# EAGLE board 13A-777-A-XB (EAGLE 9.6.2)
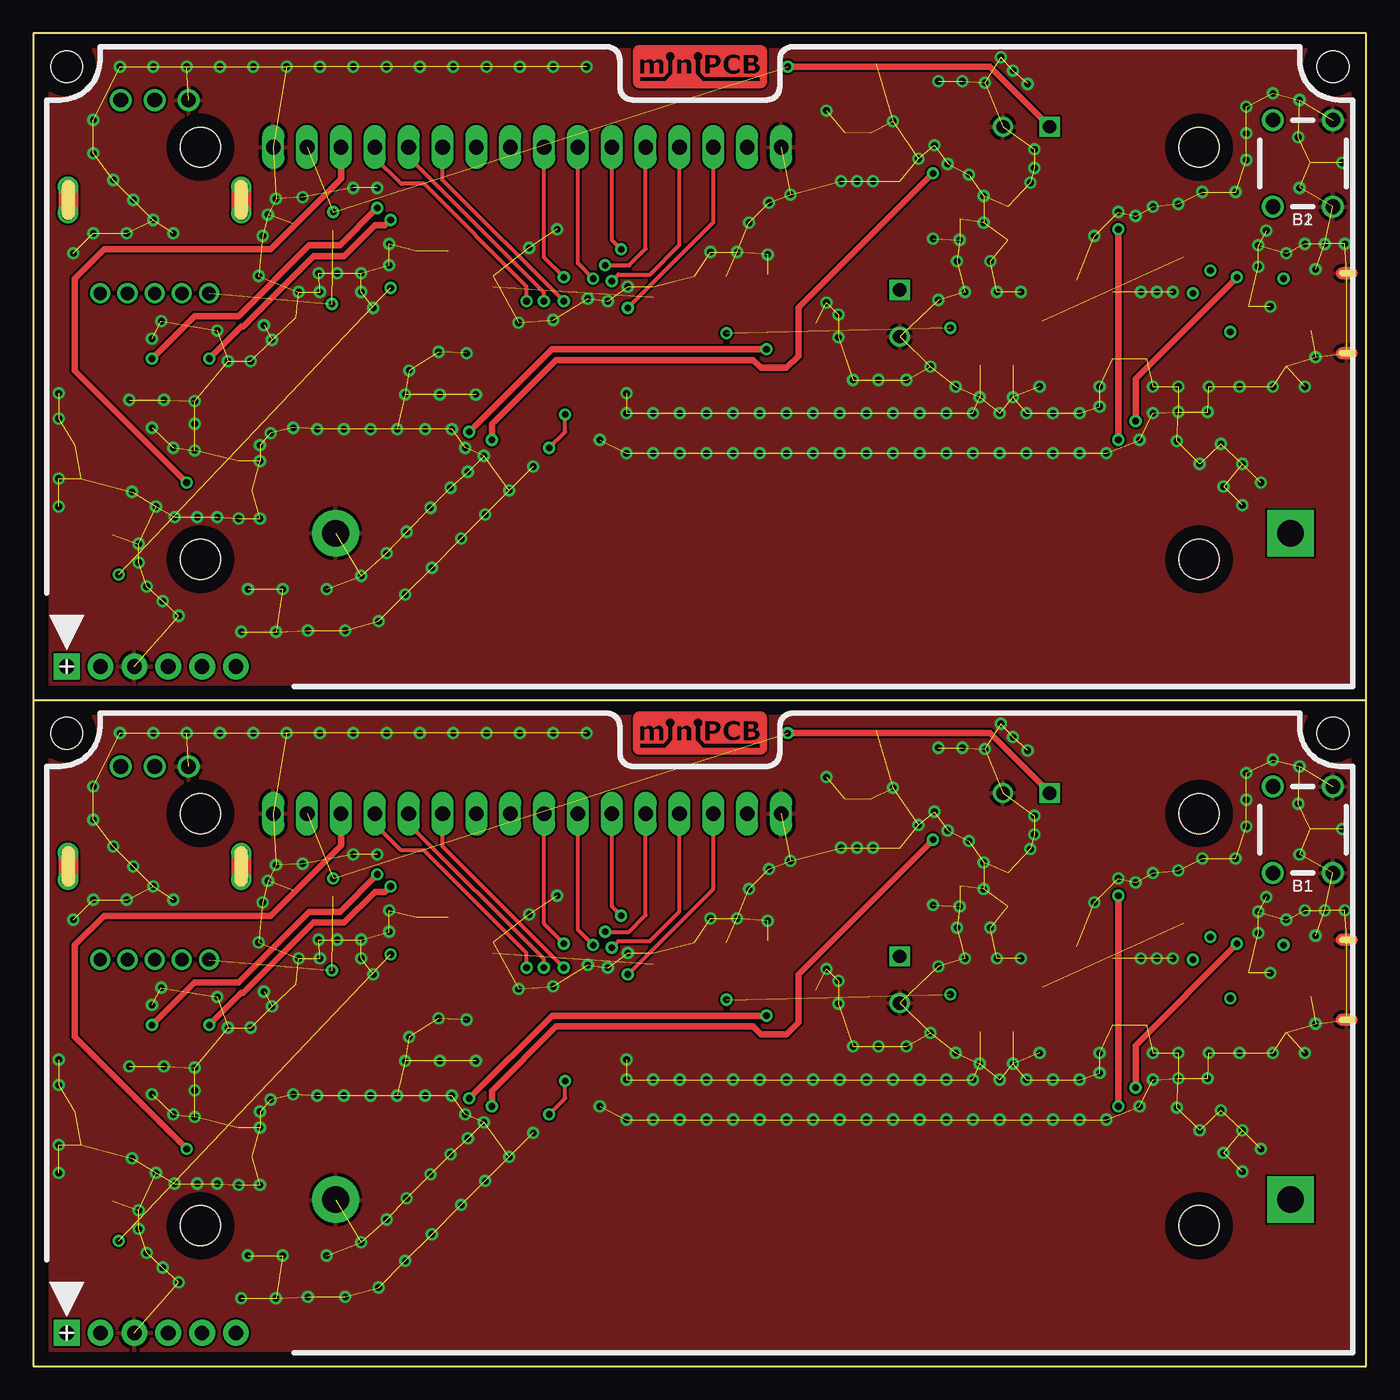
[diagram p0: board, top side]
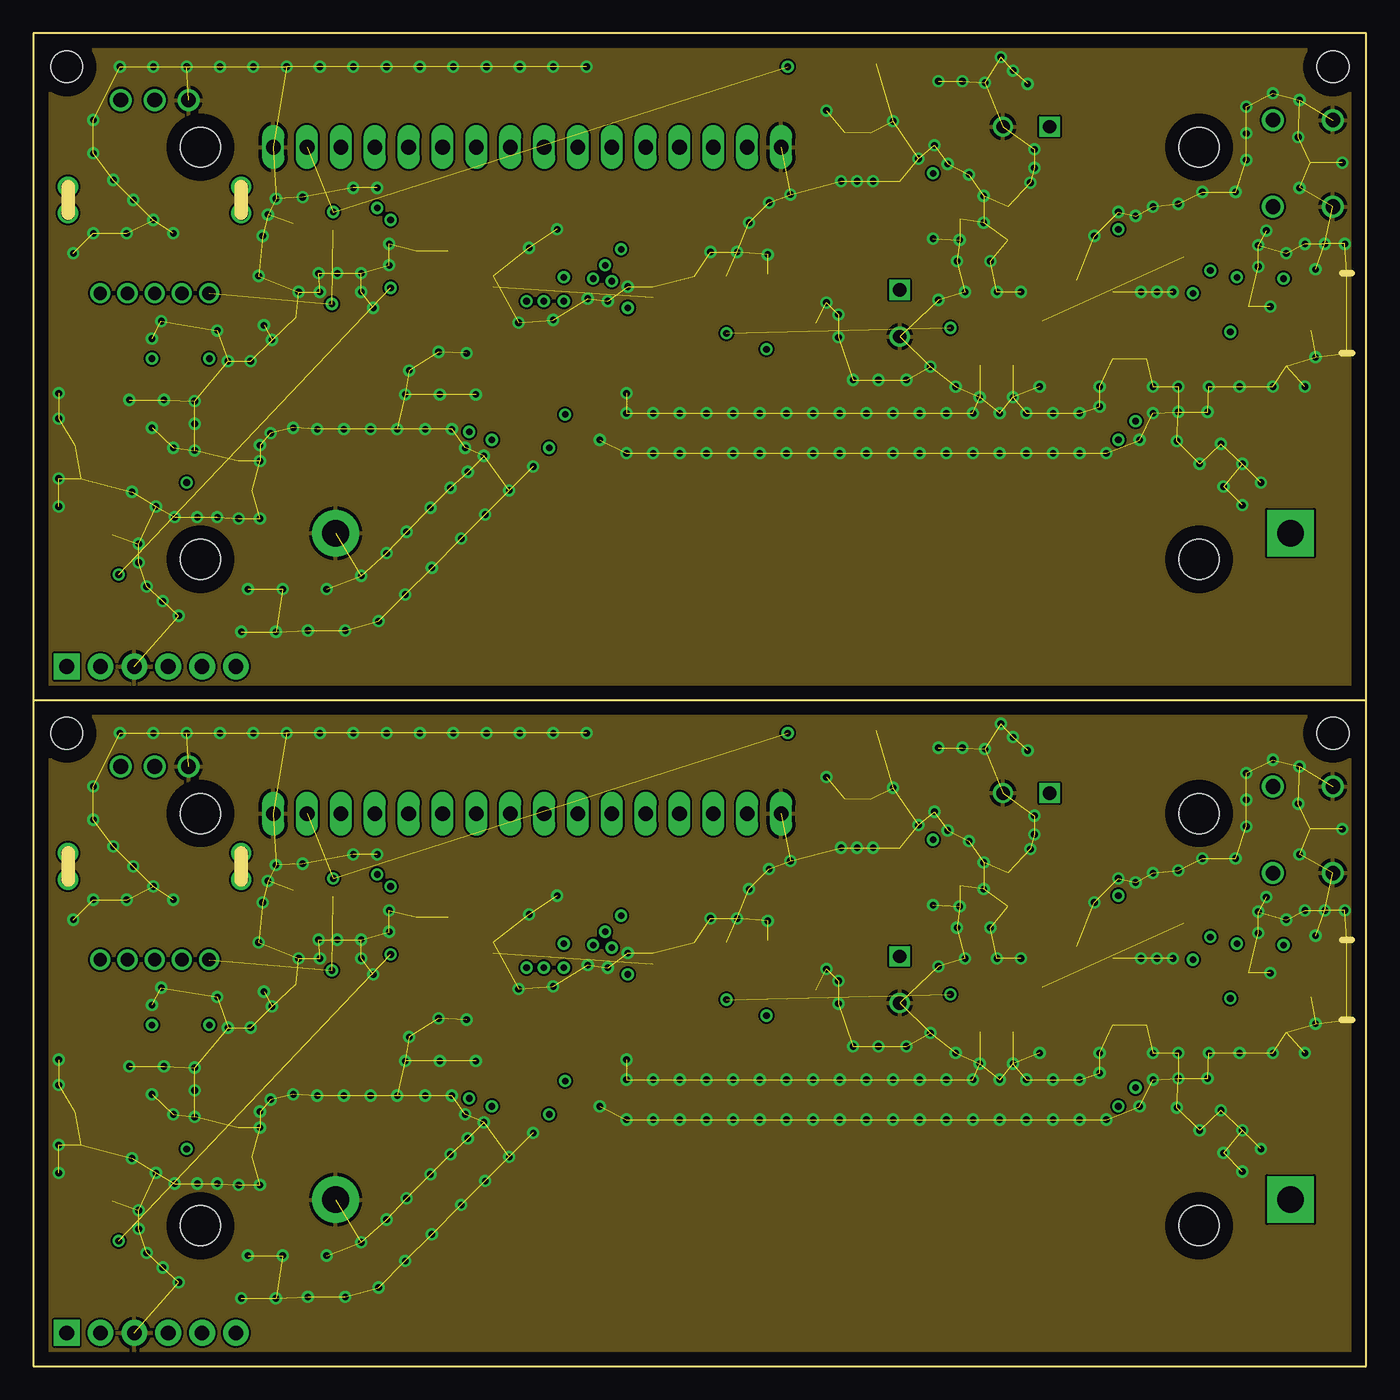
[diagram p1: board, inner layer Route2]
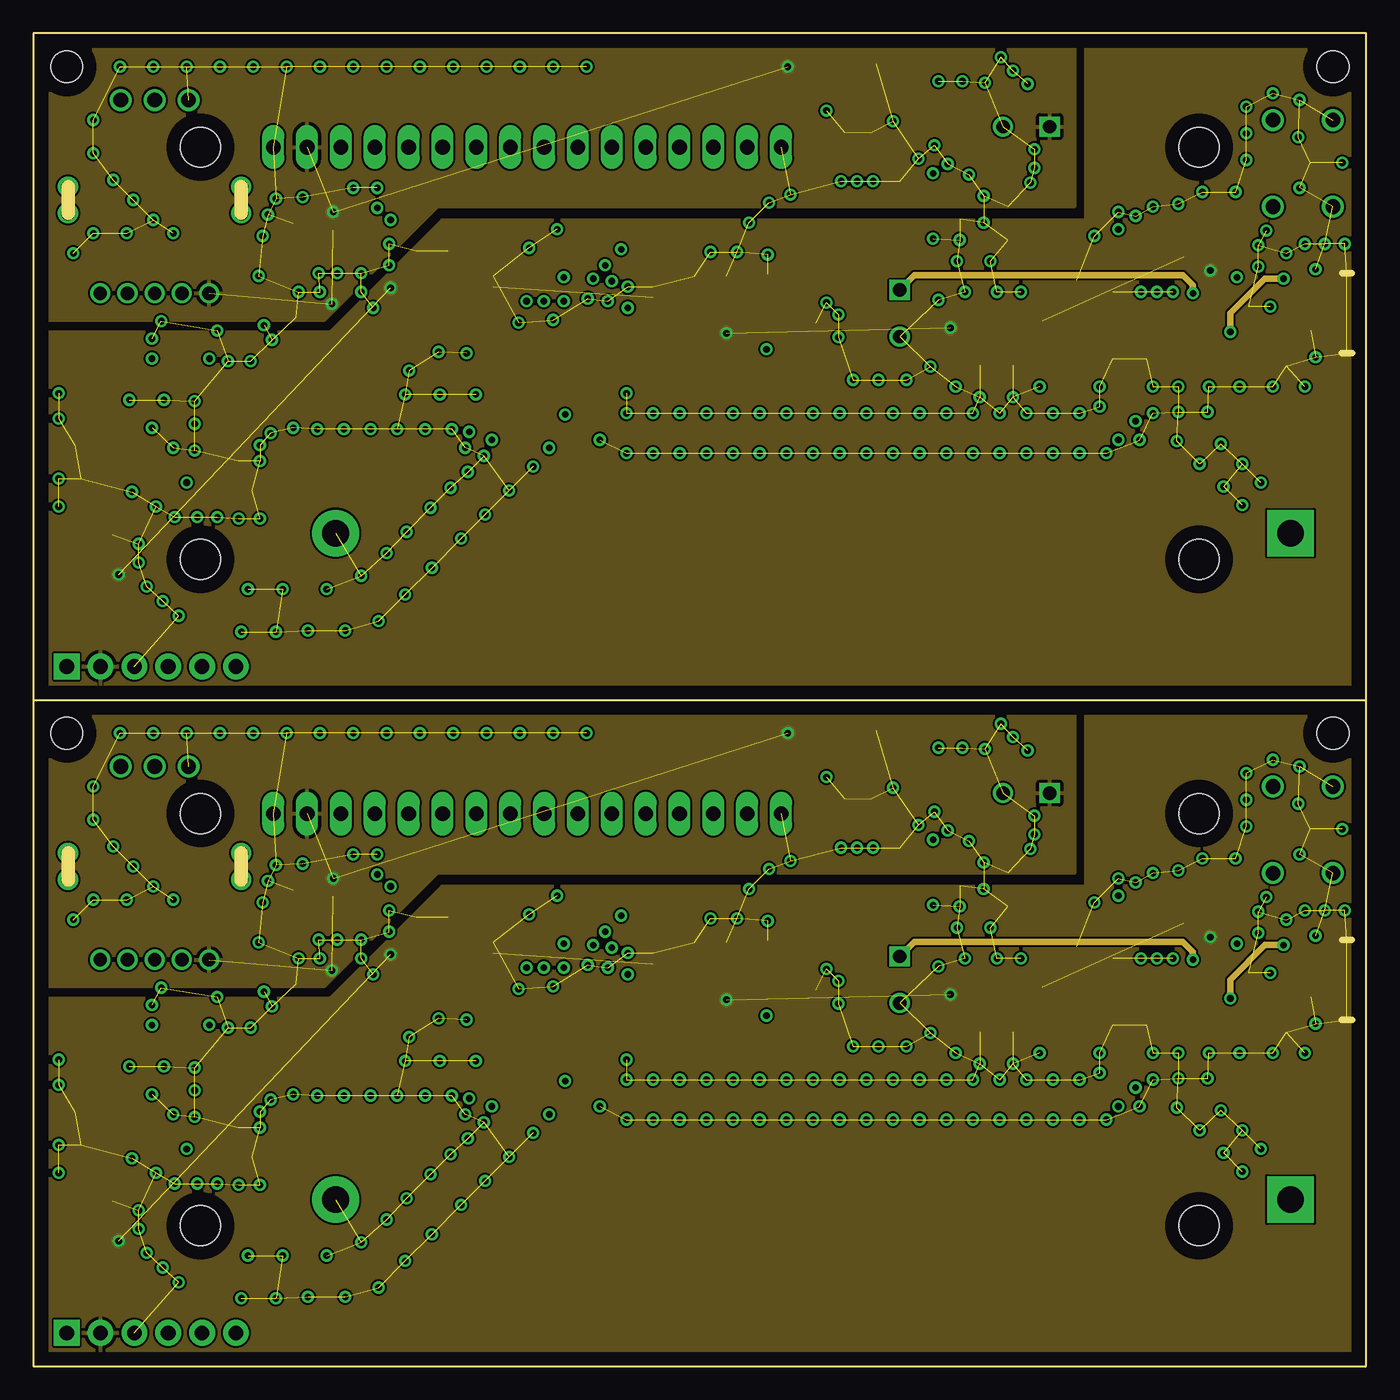
[diagram p2: board, inner layer Route15]
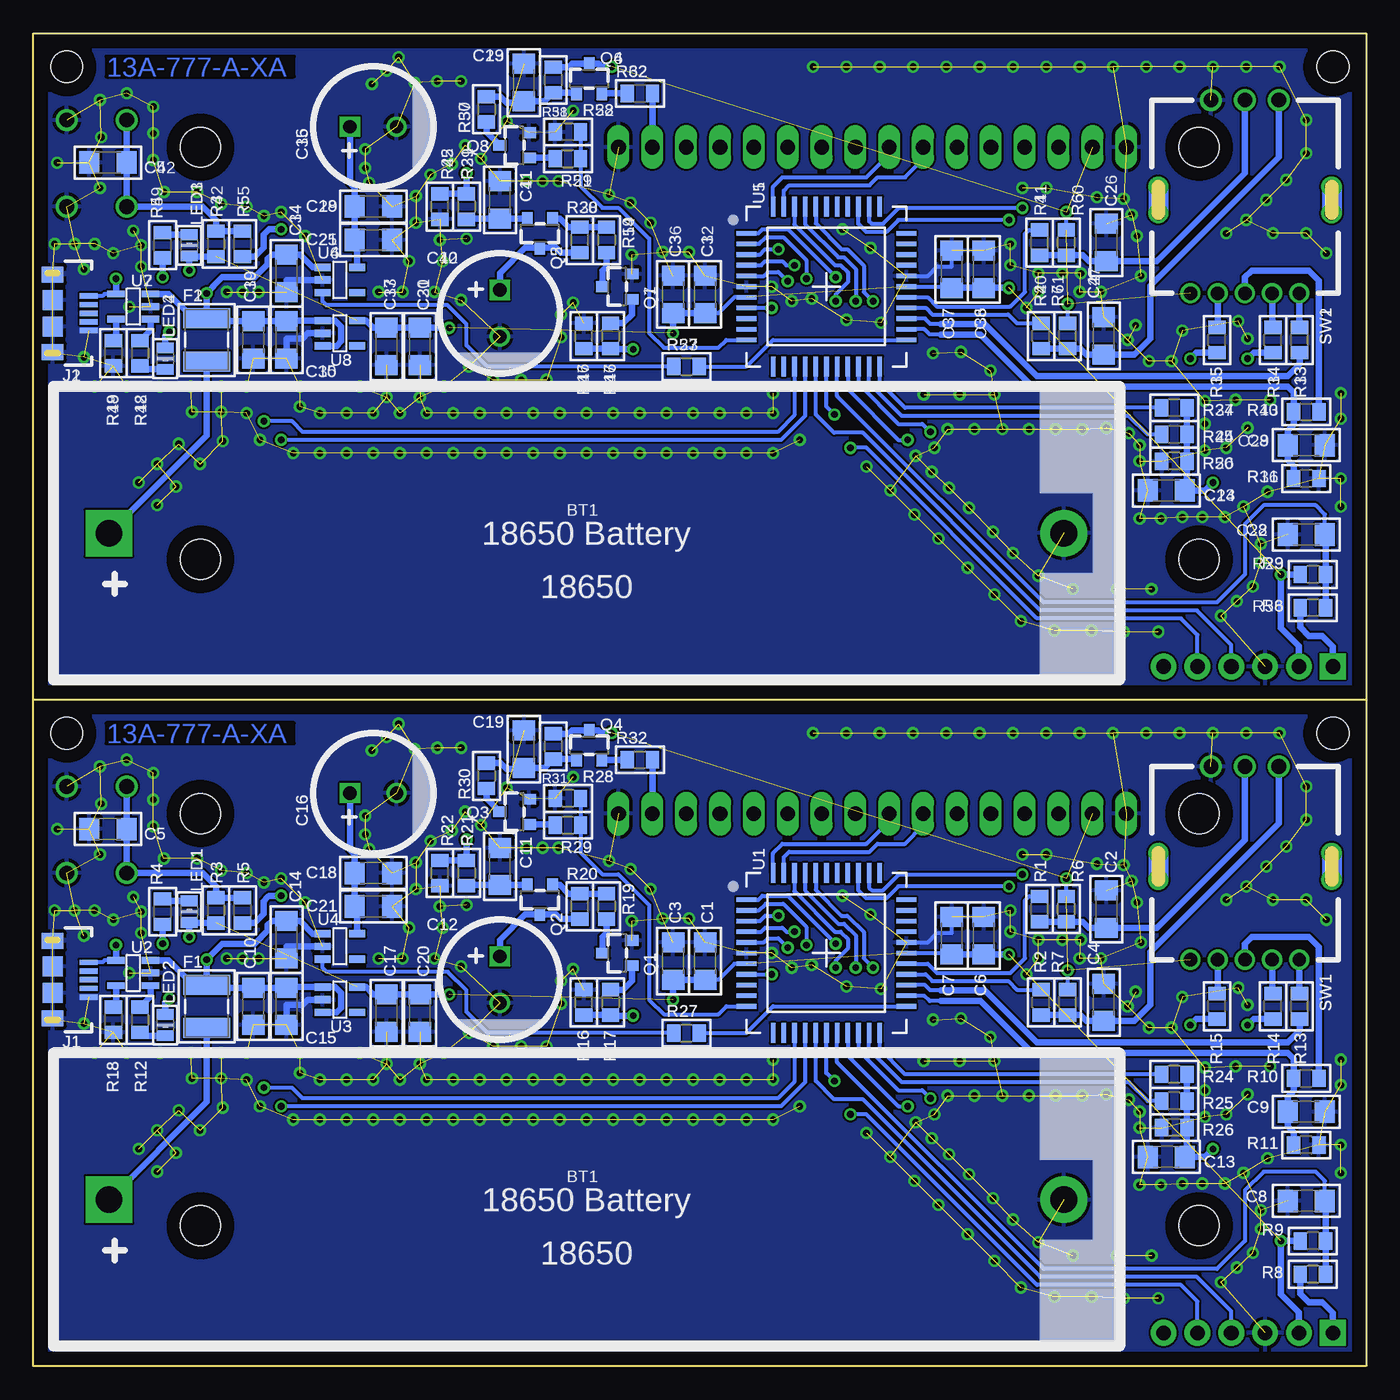
[diagram p3: board, bottom side, seen from below]

Size 100 x 100 mm. Coordinates in mm from the lower left corner, seen from the top.
Outline: 0,0 100,0
Outline: 100,0 100,50
Outline: 0,50 0,0
Outline: 0,50 100,50
Outline: 100,50 100,100
Outline: 100,100 0,100
Outline: 0,100 0,50
Outline: 0,0 0,100
Outline: 100,100 100,0
Copper layers (1*16): Top 0.035mm / dielectric 0.15mm / Bottom 0.035mm
Design rules "default": minimum track width 6mil, minimum drill 0.35mm, track to track 6mil, track to pad 6mil, pad to pad 6mil, via to via 6mil, smd to smd 6mil, copper to edge 40mil, drill to drill 6mil, minimum pad ring 10mil, minimum via ring 8mil, stop-mask expansion 4mil, vias tented up to drill 0mil, thermal gap 10mil

## Footprints (pad centres in the part's own frame; a part is rotated, then mirrored left to right if it is on the bottom)
6X6MM = drill 1.1: 1.A 0,0; 2.A 6.5,0; 3.B 0,4.5; 4.B 6.5,4.5
BATTERY-18650-1-NOHOLES = drill 2 pad 3.5: 1 35.82,0 | drill 2 pad 3.5 square: + -35.82,0
C1206 = smd 1.5 x 1.7: + -1.4,0; - 1.4,0
C3-5MM = drill 1 square: + -1.75,0 | drill 1: - 1.75,0
1812L010DR = smd 1.5 x 3.5: 1 -1.615,0; 2 1.615,0
USB_MICRO_B = smd 0.4 x 1.35: 1 -1.3,1.35; 2 -0.65,1.35; 3 0,1.35; 4 0.65,1.35; 5 1.3,1.35 | smd 0.9 x 1.6: GND5 -3,-1.35; GND8 3,-1.35 | smd 0.9 x 1.6 bottom: GND6 -3,-1.35; GND9 3,-1.35 | smd 1.2 x 1.6: GND7 -2.9,-1.35; GND10 2.9,-1.35 | smd 1.5 x 1.5: XPAD3 -1,-1.35; XPAD4 1,-1.35
CHIP-LED0805 = smd 1.27 x 0.8: A 0,-0.8; C 0,0.8
MINIPCB_0P_50X100MM = hole 2.4: 97.5,47.5; 2.5,47.5
SOT23 = smd 0.8 x 1: 1 -0.95,-1.1; 2 0.95,-1.1; 3 0,1.1
R0805 = smd 1 x 1.3: 1 -0.95,0; 2 0.95,0
SWITCH-ROTARY_ENCODER-12MM = drill 1: 1 7,4.08; 2 7,2.04; 3 7,0; 4 7,-2.04; 5 7,-4.08; GND1 -1,6.5; GND2 1,6.5; GND3 -1,-6.5; GND4 1,-6.5 | drill 1.1: A -7.5,2.54; B -7.5,0; C -7.5,-2.54
SQFP-S-10X10-44 = smd 0.35 x 1.5: 1 -4,-6; 2 -3.2,-6; 3 -2.4,-6; 4 -1.6,-6; 5 -0.8,-6; 6 0,-6; 7 0.8,-6; 8 1.6,-6; 9 2.4,-6; 10 3.2,-6; 11 4,-6; 23 4,6; 24 3.2,6; 25 2.4,6; 26 1.6,6; 27 0.8,6; 28 0,6; 29 -0.8,6; 30 -1.6,6; 31 -2.4,6; 32 -3.2,6; 33 -4,6 | smd 1.5 x 0.35: 12 6,-4; 13 6,-3.2; 14 6,-2.4; 15 6,-1.6; 16 6,-0.8; 17 6,0; 18 6,0.8; 19 6,1.6; 20 6,2.4; 21 6,3.2; 22 6,4; 34 -6,4; 35 -6,3.2; 36 -6,2.4; 37 -6,1.6; 38 -6,0.8; 39 -6,0; 40 -6,-0.8; 41 -6,-1.6; 42 -6,-2.4; 43 -6,-3.2; 44 -6,-4
SOT-23-5_MC_MCH = smd 1.321 x 0.508: 1 -1.295,0.95; 2 -1.295,0; 3 -1.295,-0.95; 4 1.295,-0.95; 5 1.295,0.95
SOT25 = smd 0.55 x 1.2: 1 -0.95,-1.3; 2 0,-1.3; 3 0.95,-1.3; 4 0.95,1.3; 5 -0.95,1.3
PINS_6_PICKIT3 = drill 1.1 pad 1.93 square: 1 0,0 | drill 1.1 pad 1.93: 2 0,-2.54; 3 0,-5.08; 4 0,-7.62; 5 0,-10.16; 6 0,-12.7
LCD1602 = drill 1.1 long: 1 8,33.46; 2 10.54,33.46; 3 13.08,33.46; 4 15.62,33.46; 5 18.16,33.46; 6 20.7,33.46; 7 23.24,33.46; 8 25.78,33.46; 9 28.32,33.46; 10 30.86,33.46; 11 33.4,33.46; 12 35.94,33.46; 13 38.48,33.46; 14 41.02,33.46; 15 43.56,33.46; 16 46.1,33.46 | hole 3: 2.54,2.54; 2.54,33.46; 77.46,33.46; 77.46,2.54

## Placement (x,y rotation side)
B1  [6X6MM]  97.5,37 90 top
B2  [6X6MM]  97.5,87 90 top
BT1  18650  [BATTERY-18650-1-NOHOLES]  58.5,12.5 0 bottom
BT2  18650  [BATTERY-18650-1-NOHOLES]  58.5,62.5 0 bottom
C1  680n  [C1206]  49.6,30.4 90 bottom
C2  680n  [C1206]  19.5,34.3 90 bottom
C3  6n8  [C1206]  52,30.4 90 bottom
C4  680n  [C1206]  19.7,27.3 90 bottom
C5  680n  [C1206]  94.4,40.3 180 bottom
C6  680n  [C1206]  28.7,32.3 90 bottom
C7  6n8  [C1206]  31.1,32.3 90 bottom
C8  680n  [C1206]  4.5,12.4 180 bottom
C9  680n  [C1206]  4.5,19.1 0 bottom
C10  4u7  [C1206]  83.5,27 270 bottom
C11  680n  [C1206]  65,37.5 90 bottom
C12  22u 25V  [C3-5MM]  65,29 270 bottom
C13  680n  [C1206]  15,15.7 180 bottom
C14  680n  [C1206]  81,32 270 bottom
C15  680n  [C1206]  81,27 270 bottom
C16  22u 25V  [C3-5MM]  74.5,43 0 bottom
C17  6n8  [C1206]  73.5,26.5 270 bottom
C18  6n8  [C1206]  74.5,37 0 bottom
C19  680n  [C1206]  63.2,46.3 90 bottom
C20  680n  [C1206]  71,26.5 270 bottom
C21  680n  [C1206]  74.5,34.5 0 bottom
C22  680n  [C1206]  4.5,62.4 180 bottom
C23  680n  [C1206]  63.2,96.3 90 bottom
C24  680n  [C1206]  15,65.7 180 bottom
C25  680n  [C1206]  74.5,84.5 0 bottom
C26  680n  [C1206]  19.5,84.3 90 bottom
C27  680n  [C1206]  19.7,77.3 90 bottom
C28  680n  [C1206]  4.5,69.1 0 bottom
C29  6n8  [C1206]  74.5,87 0 bottom
C30  680n  [C1206]  81,77 270 bottom
C31  680n  [C1206]  71,76.5 270 bottom
C32  680n  [C1206]  49.6,80.4 90 bottom
C33  6n8  [C1206]  73.5,76.5 270 bottom
C34  680n  [C1206]  81,82 270 bottom
C35  22u 25V  [C3-5MM]  74.5,93 0 bottom
C36  6n8  [C1206]  52,80.4 90 bottom
C37  6n8  [C1206]  31.1,82.3 90 bottom
C38  680n  [C1206]  28.7,82.3 90 bottom
C39  4u7  [C1206]  83.5,77 270 bottom
C40  22u 25V  [C3-5MM]  65,79 270 bottom
C41  680n  [C1206]  65,87.5 90 bottom
C42  680n  [C1206]  94.4,90.3 180 bottom
F1  1A  [1812L010DR]  87,27 90 bottom
F2  1A  [1812L010DR]  87,77 90 bottom
J1  [USB_MICRO_B]  97.2,29 270 bottom
J2  [USB_MICRO_B]  97.2,79 270 bottom
LED1  [CHIP-LED0805]  88.3,34.1 0 bottom
LED2  [CHIP-LED0805]  90.1,25.6 180 bottom
LED3  [CHIP-LED0805]  88.3,84.1 0 bottom
LED4  [CHIP-LED0805]  90.1,75.6 180 bottom
PCB  PCB-50/100-0  [MINIPCB_0P_50X100MM]  0,0 0 top
PCB1  PCB-50/100-0  [MINIPCB_0P_50X100MM]  0,50 0 top
Q1  2N7002  [SOT23]  56.2,31 90 bottom
Q2  NTR2101P  [SOT23]  62,35 180 bottom
Q3  2N7002  [SOT23]  63.9,41.6 90 bottom
Q4  NTR2101P  [SOT23]  58.3,46.6 0 bottom
Q5  NTR2101P  [SOT23]  62,85 180 bottom
Q6  NTR2101P  [SOT23]  58.3,96.6 0 bottom
Q7  2N7002  [SOT23]  56.2,81 90 bottom
Q8  2N7002  [SOT23]  63.9,91.6 90 bottom
R1  10k  [R0805]  24.5,34.3 90 bottom
R2  10k  [R0805]  24.4,27.3 90 bottom
R3  10K  [R0805]  86.3,34.2 270 bottom
R4  150  [R0805]  90.3,34.1 90 bottom
R5  10K  [R0805]  84.3,34.2 90 bottom
R6  10k  [R0805]  22.5,34.3 90 bottom
R7  10k  [R0805]  22.4,27.3 90 bottom
R8  150  [R0805]  4,6.9 180 bottom
R9  10k  [R0805]  4,9.4 180 bottom
R10  10K  [R0805]  4.5,21.6 0 bottom
R11  499K  [R0805]  4.5,16.6 180 bottom
R12  150  [R0805]  92,26 270 bottom
R13  150  [R0805]  5,27 90 bottom
R14  150  [R0805]  7,27 90 bottom
R15  150  [R0805]  11.2,27 90 bottom
R16  10k  [R0805]  58.7,27.3 90 bottom
R17  10k  [R0805]  56.7,27.3 270 bottom
R18  2K  [R0805]  94,26 270 bottom
R19  10k  [R0805]  57,34.5 270 bottom
R20  499K  [R0805]  59,34.5 90 bottom
R21  4K99  [R0805]  67.5,37 270 bottom
R22  4K99  [R0805]  69.5,37 90 bottom
R23  10k  [R0805]  4,59.4 180 bottom
R24  1K  [R0805]  14.4,21.9 180 bottom
R25  1K  [R0805]  14.4,19.9 180 bottom
R26  1K  [R0805]  14.4,17.9 180 bottom
R27  150  [R0805]  51,25 0 bottom
R28  10k  [R0805]  59.9,42.6 180 bottom
R29  10k  [R0805]  59.9,40.6 0 bottom
R30  10k  [R0805]  66,44.3 270 bottom
R31  499K  [R0805]  61,46.5 270 bottom
R32  150  [R0805]  54.5,45.5 0 bottom
R33  150  [R0805]  5,77 90 bottom
R34  150  [R0805]  7,77 90 bottom
R35  150  [R0805]  11.2,77 90 bottom
R36  499K  [R0805]  4.5,66.6 180 bottom
R37  1K  [R0805]  14.4,71.9 180 bottom
R38  499K  [R0805]  59,84.5 90 bottom
R39  4K99  [R0805]  67.5,87 270 bottom
R40  10k  [R0805]  24.4,77.3 90 bottom
R41  10k  [R0805]  24.5,84.3 90 bottom
R42  10K  [R0805]  86.3,84.2 270 bottom
R43  10K  [R0805]  4.5,71.6 0 bottom
R44  1K  [R0805]  14.4,69.9 180 bottom
R45  4K99  [R0805]  69.5,87 90 bottom
R46  10k  [R0805]  56.7,77.3 270 bottom
R47  10k  [R0805]  58.7,77.3 90 bottom
R48  150  [R0805]  92,76 270 bottom
R49  2K  [R0805]  94,76 270 bottom
R50  1K  [R0805]  14.4,67.9 180 bottom
R51  10k  [R0805]  59.9,90.6 0 bottom
R52  10k  [R0805]  59.9,92.6 180 bottom
R53  150  [R0805]  51,75 0 bottom
R54  10k  [R0805]  57,84.5 270 bottom
R55  10K  [R0805]  84.3,84.2 90 bottom
R56  150  [R0805]  4,56.9 180 bottom
R57  10k  [R0805]  66,94.3 270 bottom
R58  499K  [R0805]  61,96.5 270 bottom
R59  150  [R0805]  90.3,84.1 90 bottom
R60  10k  [R0805]  22.5,84.3 90 bottom
R61  10k  [R0805]  22.4,77.3 90 bottom
R62  150  [R0805]  54.5,95.5 0 bottom
SW1  PEL12T  [SWITCH-ROTARY_ENCODER-12MM]  9.1,37.5 270 bottom
SW2  PEL12T  [SWITCH-ROTARY_ENCODER-12MM]  9.1,87.5 270 bottom
U1  PIC16F1789T-I/PT  [SQFP-S-10X10-44]  40.5,31 270 bottom
U2  MCP73831  [SOT-23-5_MC_MCH]  92.5,29.5 180 bottom
U3  ADP150AUJZ-3.3-R7  [SOT25]  77,27.5 270 bottom
U4  ADP150AUJZ-3.3-R7  [SOT25]  77,31.5 270 bottom
U5  PIC16F1789T-I/PT  [SQFP-S-10X10-44]  40.5,81 270 bottom
U6  ADP150AUJZ-3.3-R7  [SOT25]  77,81.5 270 bottom
U7  MCP73831  [SOT-23-5_MC_MCH]  92.5,79.5 180 bottom
U8  ADP150AUJZ-3.3-R7  [SOT25]  77,77.5 270 bottom
U$1  PICKIT3ARROW  [PINS_6_PICKIT3]  2.5,2.5 90 top
U$2  PICKIT3ARROW  [PINS_6_PICKIT3]  2.5,52.5 90 top
X1  HD44780LCD-1602  [LCD1602]  10,8 0 top
X2  HD44780LCD-1602  [LCD1602]  10,58 0 top

## Library data of the parts
B1 B2 BT1 BT2 C1-C42 J1 J2 LED1-LED4 Q1-Q8 R1-R62 SW1 SW2 U1 U3-U6 U8 U$1 U$2 X1 X2 = minipcb
F1 F2 = minipcb; ARROW_PART_NUMBER: 1812L050/60MR; ARROW_PRICE-STOCK: https://www.arrow.com/en/products/1812l05060mr/littelfuse?region=nac; DESCRIPTION: Resettable Fuses - PPTC PTC 60V POLYFUSE SURF MOUNT 1812 0.5A; HEIGHT: 1.25mm; MANUFACTURER_NAME: LITTELFUSE; MANUFACTURER_PART_NUMBER: 1812L050/60MR; MOUSER_PART_NUMBER: 576-1812L050/60MR; MOUSER_PRICE-STOCK: https://www.mouser.co.uk/ProductDetail/Littelfuse/1812L050-60MR?qs=lM4gFlnEeEOTL6GzziLnSw%3D%3D
PCB PCB1 = minipcb; PART_NUMBER: 13A-777-A-XA; REVISION: A
U2 U7 = minipcb; COPYRIGHT: Copyright (C) 2023 Ultra Librarian. All rights reserved.; MANUFACTURER_PART_NUMBER: MCP73831T-2ATI/OT; MFR_NAME: Microchip

## Nets
+3V1: C31.+ C32.+ C33.+ C36.+ C37.+ C38.+ LED3.A R23.2 R42.2 U5.7 U5.28 U8.5 U$2.2
+3V3: C1.+ C3.+ C6.+ C7.+ C17.+ C20.+ LED1.A R3.2 R9.2 U1.7 U1.28 U3.5 U$1.2
+3V3-LCD: C16.+ C18.+ C21.+ Q4.3 R6.2 R7.2 R31.1 SW1.5 U4.5 X1.2
+3V3-LCD1: C25.+ C29.+ C35.+ Q6.3 R58.1 R60.2 R61.2 SW2.5 U6.5 X2.2
B1: B1.3.B B1.4.B C5.+ R3.1 R5.2
B2: B2.3.B B2.4.B C42.+ R42.1 R55.2
BT+: BT1.+ F1.1
BT+1: BT2.+ F2.1
BUTTON: R5.1 U1.15
BUTTON1: R55.1 U5.15
ENC_A: R1.2 U1.27
ENC_A1: R41.2 U5.27
ENC_B: R2.2 U1.26
ENC_B1: R40.2 U5.26
ENC_BLUE: R15.1 U1.36
ENC_BLUE1: R35.1 U5.36
ENC_GREEN: R14.1 U1.35
ENC_GREEN1: R34.1 U5.35
ENC_RED: R13.1 U1.25
ENC_RED1: R33.1 U5.25
ENC_SW: C9.+ R10.1 R11.2 U1.24
ENC_SW1: C28.+ R36.2 R43.1 U5.24
GND: B1.1.A B1.2.A BT1.1 C1.- C2.- C3.- C4.- C5.- C6.- C7.- C8.- C9.- C10.- C11.- C12.- C13.- C14.- C15.- C16.- C17.- C18.- C19.- C20.- C21.- J1.5 J1.GND5 J1.GND6 J1.GND7 J1.GND8 J1.GND9 J1.GND10 J1.XPAD3 J1.XPAD4 Q1.2 Q3.2 R11.1 R16.2 R18.2 R22.1 R26.2 R28.2 SW1.C U1.6 U1.29 U2.2 U3.2 U4.2 U$1.3 X1.1 X1.16
GND1: B2.1.A B2.2.A BT2.1 C22.- C23.- C24.- C25.- C26.- C27.- C28.- C29.- C30.- C31.- C32.- C33.- C34.- C35.- C36.- C37.- C38.- C39.- C40.- C41.- C42.- J2.5 J2.GND5 J2.GND6 J2.GND7 J2.GND8 J2.GND9 J2.GND10 J2.XPAD3 J2.XPAD4 Q7.2 Q8.2 R36.1 R45.1 R47.2 R49.2 R50.2 R52.2 SW2.C U5.6 U5.29 U6.2 U7.2 U8.2 U$2.3 X2.1 X2.16
ICSPCLK: U1.17 U$1.5
ICSPCLK1: U5.17 U$2.5
ICSPDAT: U1.16 U$1.4
ICSPDAT1: U5.16 U$2.4
LCD-BACKLIGHT-A: R32.2 X1.15
LCD-BACKLIGHT-A1: R62.2 X2.15
LCD-BACKLIGHT-ENABLE: R28.1 R29.2 U1.11
LCD-BACKLIGHT-ENABLE1: R51.2 R52.1 U5.11
LCD-D0: U1.43 X1.7
LCD-D1: U1.44 X1.8
LCD-D2: U1.1 X1.9
LCD-D3: U1.2 X1.10
LCD-D4: U1.3 X1.11
LCD-D5: U1.4 X1.12
LCD-D6: U1.5 X1.13
LCD-D7: U1.8 X1.14
LCD-D8: U5.44 X2.8
LCD-D9: U5.1 X2.9
LCD-D10: U5.2 X2.10
LCD-D11: U5.43 X2.7
LCD-D12: U5.3 X2.11
LCD-D13: U5.4 X2.12
LCD-D14: U5.5 X2.13
LCD-D15: U5.8 X2.14
LCD-RE: U1.42 X1.6
LCD-RE1: U5.42 X2.6
LCD-RS: U1.40 X1.4
LCD-RS1: U5.40 X2.4
LCD-RW: U1.41 X1.5
LCD-RW1: U5.41 X2.5
LCD-V0: C13.+ R24.1 R25.1 R26.1 X1.3
LCD-V1: C24.+ R37.1 R44.1 R50.1 X2.3
LCD_ENABLE: R27.2 U1.23
LCD_ENABLE1: R53.2 U5.23
LED1: R4.1 U1.14
LED1.K: LED1.C R4.2
LED1.K1: LED3.C R59.2
LED2: R59.1 U5.14
LED2.K: LED2.C R12.2
LED2.K1: LED4.C R48.2
MCLR: C8.+ R8.1 R9.1 U1.18
MCLR1: C22.+ R23.1 R56.1 U5.18
P1-1: R8.2 U$1.1
P1-2: R56.2 U$2.1
PROG: R18.1 U2.5
PROG1: R49.1 U7.5
Q1.D: Q1.3 R19.2
Q1.D1: Q7.3 R54.2
Q1.G: Q1.1 R17.1
Q1.G1: Q7.1 R46.1
Q2.G: Q2.1 R19.1 R20.2
Q2.G1: Q5.1 R38.2 R54.1
Q2.S: C11.+ Q2.2 R21.2
Q2.S1: C41.+ Q5.2 R39.2
Q3.D: Q3.3 R30.2
Q3.D1: Q8.3 R57.2
Q3.G: Q3.1 R29.1
Q3.G1: Q8.1 R51.1
Q4.G: C19.+ Q4.1 R30.1 R31.2
Q4.G1: C23.+ Q6.1 R57.1 R58.2
Q4.S: Q4.2 R32.1
Q4.S1: Q6.2 R62.1
RA0: R21.1 R22.2 U1.19
RA1: R16.1 R17.2 U1.20
RA2: R25.2 U1.21
RA3: R24.2 U1.22
RA4: R44.2 U5.21
RA5: R39.1 R45.2 U5.19
RA6: R37.2 U5.22
RA7: R46.2 R47.1 U5.20
SW1.1: R13.2 SW1.1
SW1.2: R14.2 SW1.2
SW1.3: R10.2 SW1.3
SW1.4: R15.2 SW1.4
SW1.5: R33.2 SW2.1
SW1.6: R34.2 SW2.2
SW1.7: R35.2 SW2.4
SW1.8: R43.2 SW2.3
SW1.A: C2.+ R1.1 R6.1 SW1.B
SW1.A1: C26.+ R41.1 R60.1 SW2.B
SW1.B: C4.+ R2.1 R7.1 SW1.A
SW1.B1: C27.+ R40.1 R61.1 SW2.A
U4.1: R12.1 U2.1
U4.2: R48.1 U7.1
U4.3: R27.1 U4.3
U4.4: R53.1 U6.3
VBAT: C10.+ C12.+ C14.+ C15.+ F1.2 Q2.3 R20.1 U2.3 U3.1 U3.3 U4.1
VBAT1: C30.+ C34.+ C39.+ C40.+ F2.2 Q5.3 R38.1 U6.1 U7.3 U8.1 U8.3
VUSB: J1.1 LED2.A U2.4
VUSB1: J2.1 LED4.A U7.4

## Tracks (layer width: path | path; a pad name or v marks a point on that pad's centre or on a via)
+3V1  (via drill 0.5)  (4 unrouted)
  Bottom 0.3: U5.28 31.2,81 C37.+ 30.1,80.9 | U5.7 47.4,80.2 48.6,79 C32.+
  Bottom 0.5: U8.5 75.05,78.45 74.5,77.9 C33.+ C31.+ v68.8,77.9 | U$2.2 5.04,54.04 6.4,55.4 v6.4,59.4 R23.2 | C37.+ C38.+ v26.8,80.9 | C32.+ C36.+ v52,77.5 | R42.2 88.25,83.25 | 88.25,83.25 LED3.A | v88.3,82.2 88.3,83.2 88.25,83.25
  pour Route15: 99,51 1,51 1,77.6 22.3,77.6 30.7,86 79,86 79,99 99,99
+3V3  (via drill 0.5)  (4 unrouted)
  Bottom 0.3: U1.28 31.2,31 C7.+ 30.1,30.9 | U1.7 47.4,30.2 48.6,29 C1.+
  Bottom 0.5: U3.5 75.05,28.45 74.5,27.9 C17.+ C20.+ v68.8,27.9 | U$1.2 5.04,4.04 6.4,5.4 v6.4,9.4 R9.2 | C7.+ C6.+ v26.8,30.9 | C1.+ C3.+ v52,27.5 | R3.2 88.25,33.25 | 88.25,33.25 LED1.A | v88.3,32.2 88.3,33.2 88.25,33.25
  pour Route15: 99,1 1,1 1,27.6 22.3,27.6 30.7,36 79,36 79,49 99,49
+3V3-LCD  (via drill 0.5)  (4 unrouted)
  Top 0.5: C16.+ 71.75,47.5 v56.6,47.5
  Bottom 0.3: R6.2 v22.5,36.6 | R7.2 v22.4,29.7
  Bottom 0.5: U4.5 75.7,34.3 C21.+ C18.+ 75.9,38.4 76.25,38.75 C16.+ | v56.6,47.5 57.4,47.5 57.6,47.7 Q4.3 59.6,47.7 59.85,47.45 R31.1
  pour Route15: 78.1,49 78.1,37 30.3,37 21.8,28.5 1,28.5 1,49
+3V3-LCD1  (via drill 0.5)  (4 unrouted)
  Top 0.5: C35.+ 71.75,97.5 v56.6,97.5
  Bottom 0.3: R60.2 v22.5,86.6 | R61.2 v22.4,79.7
  Bottom 0.5: U6.5 75.7,84.3 C25.+ C29.+ 75.9,88.4 76.25,88.75 C35.+ | v56.6,97.5 57.4,97.5 57.6,97.7 Q6.3 59.6,97.7 59.85,97.45 R58.1
  pour Route15: 78.1,99 78.1,87 30.3,87 21.8,78.5 1,78.5 1,99
B1
  Bottom 0.5: B1.4.B C5.+ B1.3.B 87.3,37 86.3,36 R3.1 R5.2
B2
  Bottom 0.5: B2.4.B C42.+ B2.3.B 87.3,87 86.3,86 R42.1 R55.2
BT+
  Bottom 0.5: BT1.+ 87,19.82 F1.1
BT+1
  Bottom 0.5: BT2.+ 87,69.82 F2.1
BUTTON  (via drill 0.5)
  Top 0.5: v81.4,19.5 v81.4,35.3
  Bottom 0.3: U1.15 42.1,21.3 43.9,19.5 v81.4,19.5
  Bottom 0.5: R5.1 83.38,33.25 82.72,33.92 82.72,34.88 82.4,35.2 82.3,35.3 v81.4,35.3
BUTTON1  (via drill 0.5)
  Top 0.5: v81.4,69.5 v81.4,85.3
  Bottom 0.3: U5.15 42.1,71.3 43.9,69.5 v81.4,69.5
  Bottom 0.5: R55.1 83.38,83.25 82.72,83.92 82.72,84.88 82.4,85.2 82.3,85.3 v81.4,85.3
ENC_A
  Bottom 0.3: U1.27 32.9,30.2 32.2,29.5 26.7,29.5 25.6,30.6 25.6,34.95 25.3,35.25 R1.2
ENC_A1
  Bottom 0.3: U5.27 32.9,80.2 32.2,79.5 26.7,79.5 25.6,80.6 25.6,84.95 25.3,85.25 R41.2
ENC_B
  Bottom 0.3: U1.26 33.05,29.4 32.55,28.9 26.85,28.9 26.2,28.25 R2.2
ENC_B1
  Bottom 0.3: U5.26 33.05,79.4 32.55,78.9 26.85,78.9 26.2,78.25 R40.2
ENC_BLUE  (via drill 0.5)
  Top 0.5: v13.2,25.6 15.6,28 15.73,28 21.03,33.3 23.33,33.3 25.63,35.6 26.4,35.6 v26.8,36
  Bottom 0.3: v26.8,36 35.1,36 36,35.1 37.5,35.1 38.1,35.7 U1.36
  Bottom 0.5: R15.1 12.75,26.05 v13.2,25.6
ENC_BLUE1  (via drill 0.5)
  Top 0.5: v13.2,75.6 15.6,78 15.73,78 21.03,83.3 23.33,83.3 25.63,85.6 26.4,85.6 v26.8,86
  Bottom 0.3: v26.8,86 35.1,86 36,85.1 37.5,85.1 38.1,85.7 U5.36
  Bottom 0.5: R35.1 12.75,76.05 v13.2,75.6
ENC_GREEN  (via drill 0.5)
  Top 0.5: v8.9,25.6 12.1,28.8 15.4,28.8 20.7,34.1 23,34.1 v25.8,36.9
  Bottom 0.3: U1.35 37.3,35.9 37.1,35.7 36.25,35.7 35.05,36.9 v25.8,36.9
  Bottom 0.5: R14.1 8.45,26.05 v8.9,25.6
ENC_GREEN1  (via drill 0.5)
  Top 0.5: v8.9,75.6 12.1,78.8 15.4,78.8 20.7,84.1 23,84.1 v25.8,86.9
  Bottom 0.3: U5.35 37.3,85.9 37.1,85.7 36.25,85.7 35.05,86.9 v25.8,86.9
  Bottom 0.5: R34.1 8.45,76.05 v8.9,75.6
ENC_RED
  Bottom 0.3: U1.25 33.1,28.6 32.7,28.2 31.9,28.2
  Bottom 0.5: R13.1 5,25.2 5.9,24.3 24.7,24.3 28.6,28.2 31.9,28.2
ENC_RED1
  Bottom 0.3: U5.25 33.1,78.6 32.7,78.2 31.9,78.2
  Bottom 0.5: R33.1 5,75.2 5.9,74.3 24.7,74.3 28.6,78.2 31.9,78.2
ENC_SW
  Bottom 0.3: U1.24 33.15,27.8 32.75,27.4 31.9,27.4
  Bottom 0.5: R11.2 5.45,17.55 5.9,18 C9.+ 5.9,20.2 5.45,20.65 R10.1 5.45,23.05 5.9,23.5 25.03,23.5 28.93,27.4 31.9,27.4
ENC_SW1
  Bottom 0.3: U5.24 33.15,77.8 32.75,77.4 31.9,77.4
  Bottom 0.5: R36.2 5.45,67.55 5.9,68 C28.+ 5.9,70.2 5.45,70.65 R43.1 5.45,73.05 5.9,73.5 25.03,73.5 28.93,77.4 31.9,77.4
GND  (via drill 0.5)  (292 unrouted)
  Bottom 0.3: U1.29 32.9,31.8 32.2,32.5 31.1,32.5 C7.-
  Bottom 0.5: U3.2 79.4,27.5 79.8,27.1 81,27.1 C15.- | U4.2 81,31.5 C14.-
  other vias: 92.8,29.5 85.5,30.6 84.3,30.6 83.1,30.6 44.6,31 50.8,33.6 71.3,35.8 71.3,37.8 69.5,34.5 55.1,33.4 52.8,33.6 63,38.9 66.4,40.6 61.8,38.9 60.6,38.9 56.8,37.9 55.2,37.3 53.7,35.8 67.6,41.6 64.5,43.4 59.5,44.2 60.4,27.2 60.4,28.9 59.5,29.8 17,17.9 17,19.1 17,13.6 15.4,13.6 13.8,13.7 12.3,13.7 10.6,13.7 7.9,11.7 7.9,10.3 8.5,8.5 10.9,6.3 9.7,7.4 9.2,14.5 7.4,15.6 12.1,22.4 9.8,22.5 7.2,22.5 12.1,18.7 12.1,20.7 17.8,20 19.5,20.4 31.4,20.3 33.8,18.3 29.4,20.3 27.3,20.3 32.6,17.1 32.4,18.9 31.3,15.9 29.8,14.4 95.4,23.5 93,23.5 90.5,23.5 88.2,23.5 85.9,23.5 84,23.5 80,23.5 75.5,23.5 69.2,23.5 73.5,22.7 71,22.7 74.1,30.6 72.3,30.6 69.9,30.6 67.9,30 69.3,32.9 71.8,32.9 67.5,34.6 95,38.4 94.9,42.2 98.2,40.3 90.2,38.1 87.7,38.1 85.9,37.2 91.9,34.1 92.5,35.2 91.9,32.5 82.7,36.3 81.4,36.6 79.6,34.8 75.1,41.3 75.1,39.9 74.8,38.8 70.2,39.4 68.6,40.2 71.4,46.3 69.7,46.4 67.9,46.4 74.6,46.2 73.5,47.2 72.6,48.2 17.9,27 17.3,28.1 21.4,32 19.9,30.6 16.9,31.8 22.8,32 24.6,32 25.5,29.4 24.6,30.6 21.5,30.6 20.2,37.7 18.2,37.6 17.6,36.4 17.2,34.8 25.8,38.4 24,38.4 26.7,34.2 26.7,32.6 37.2,33.9 39.3,35.3 36.4,28.3 39,28.5 43.1,29.9 41.6,30.1 32.5,26 30.4,26.1 28.2,24.7 33.2,22.9 30.5,22.9 27.9,22.9 16.3,25.4 14.6,25.4 13.8,27.7 8.9,27.1 9.6,28.4 10.5,18.9 8.9,20.4 1.9,21.1 1.9,23 1.9,16.6 1.9,14.5 65.5,24 63.4,24 61.5,24 67.3,25 37.5,17.5 35.7,15.7 33.9,13.9 32.1,12.1 29.9,9.9 27.9,7.9 25.9,5.9 23.4,5.2 20.6,5.2 18.2,5.1 15.6,5.1 28,12.6 26.5,11 24.6,9.3 22,8.3 18.7,8.3 16.1,8.3 98.4,34.2 96.9,34.2 95.4,34.2 96.2,25.7 96.2,32.3 88.1,21.6 89.1,19.2 92.1,16.3 90.7,17.7 85.9,21.6 87.5,17.7 89.3,16 90.7,14.6 85.8,19.4 74.5,18.5 78.5,21.5 72.5,18.5 70.5,18.5 68.5,18.5 66.5,18.5 64.5,18.5 62.5,18.5 60.5,18.5 58.5,18.5 56.5,18.5 54.5,18.5 52.5,18.5 50.5,18.5 48.5,18.5 76.5,21.5 74.5,21.5 72.5,21.5 70.5,21.5 68.5,21.5 66.5,21.5 64.5,21.5 62.5,21.5 60.5,21.5 58.5,21.5 56.5,21.5 54.5,21.5 52.5,21.5 50.5,21.5 80,22 76.5,18.5 78.5,18.5 80.5,18.5 48.5,21.5 46.5,21.5 46.5,18.5 44.5,21.5 44.5,18.5 42.5,19.5 83,19.5 84,21.5 84,37 91,44.5 91,42.5 95,45 93,45.5 91,40.5 94,33.5 44.5,23 25.3,20.3 23.3,20.3 21.3,20.3 16.5,47.5 14,47.5 11.5,47.5 9,47.5 4.5,43.5 4.5,41 6,39 7.5,37.5 19,47.5 21.5,47.5 24,47.5 26.5,47.5 29,47.5 31.5,47.5 34,47.5 36.5,47.5 39,47.5 41.5,47.5 6.5,47.5 9,36 7,35 4.5,35 3,33.5 10.5,35
  pour Bottom: 99,1 1,1 1,49 99,49
  pour Top: 99,1 1,1 1,49 99,49
  pour Route2: 99,1 1,1 1,49 99,49
GND1  (via drill 0.5)  (292 unrouted)
  Bottom 0.3: U5.29 32.9,81.8 32.2,82.5 31.1,82.5 C37.-
  Bottom 0.5: U8.2 79.4,77.5 79.8,77.1 81,77.1 C30.- | U6.2 81,81.5 C34.-
  other vias: 92.8,79.5 85.5,80.6 84.3,80.6 83.1,80.6 44.6,81 50.8,83.6 71.3,85.8 71.3,87.8 69.5,84.5 55.1,83.4 52.8,83.6 63,88.9 66.4,90.6 61.8,88.9 60.6,88.9 56.8,87.9 55.2,87.3 53.7,85.8 67.6,91.6 64.5,93.4 59.5,94.2 60.4,77.2 60.4,78.9 59.5,79.8 17,67.9 17,69.1 17,63.6 15.4,63.6 13.8,63.7 12.3,63.7 10.6,63.7 7.9,61.7 7.9,60.3 8.5,58.5 10.9,56.3 9.7,57.4 9.2,64.5 7.4,65.6 12.1,72.4 9.8,72.5 7.2,72.5 12.1,68.7 12.1,70.7 17.8,70 19.5,70.4 31.4,70.3 33.8,68.3 29.4,70.3 27.3,70.3 32.6,67.1 32.4,68.9 31.3,65.9 29.8,64.4 95.4,73.5 93,73.5 90.5,73.5 88.2,73.5 85.9,73.5 84,73.5 80,73.5 75.5,73.5 69.2,73.5 73.5,72.7 71,72.7 74.1,80.6 72.3,80.6 69.9,80.6 67.9,80 69.3,82.9 71.8,82.9 67.5,84.6 95,88.4 94.9,92.2 98.2,90.3 90.2,88.1 87.7,88.1 85.9,87.2 91.9,84.1 92.5,85.2 91.9,82.5 82.7,86.3 81.4,86.6 79.6,84.8 75.1,91.3 75.1,89.9 74.8,88.8 70.2,89.4 68.6,90.2 71.4,96.3 69.7,96.4 67.9,96.4 74.6,96.2 73.5,97.2 72.6,98.2 17.9,77 17.3,78.1 21.4,82 19.9,80.6 16.9,81.8 22.8,82 24.6,82 25.5,79.4 24.6,80.6 21.5,80.6 20.2,87.7 18.2,87.6 17.6,86.4 17.2,84.8 25.8,88.4 24,88.4 26.7,84.2 26.7,82.6 37.2,83.9 39.3,85.3 36.4,78.3 39,78.5 43.1,79.9 41.6,80.1 32.5,76 30.4,76.1 28.2,74.7 33.2,72.9 30.5,72.9 27.9,72.9 16.3,75.4 14.6,75.4 13.8,77.7 8.9,77.1 9.6,78.4 10.5,68.9 8.9,70.4 1.9,71.1 1.9,73 1.9,66.6 1.9,64.5 65.5,74 63.4,74 61.5,74 67.3,75 37.5,67.5 35.7,65.7 33.9,63.9 32.1,62.1 29.9,59.9 27.9,57.9 25.9,55.9 23.4,55.2 20.6,55.2 18.2,55.1 15.6,55.1 28,62.6 26.5,61 24.6,59.3 22,58.3 18.7,58.3 16.1,58.3 98.4,84.2 96.9,84.2 95.4,84.2 96.2,75.7 96.2,82.3 88.1,71.6 89.1,69.2 92.1,66.3 90.7,67.7 85.9,71.6 87.5,67.7 89.3,66 90.7,64.6 85.8,69.4 74.5,68.5 78.5,71.5 72.5,68.5 70.5,68.5 68.5,68.5 66.5,68.5 64.5,68.5 62.5,68.5 60.5,68.5 58.5,68.5 56.5,68.5 54.5,68.5 52.5,68.5 50.5,68.5 48.5,68.5 76.5,71.5 74.5,71.5 72.5,71.5 70.5,71.5 68.5,71.5 66.5,71.5 64.5,71.5 62.5,71.5 60.5,71.5 58.5,71.5 56.5,71.5 54.5,71.5 52.5,71.5 50.5,71.5 80,72 76.5,68.5 78.5,68.5 80.5,68.5 48.5,71.5 46.5,71.5 46.5,68.5 44.5,71.5 44.5,68.5 42.5,69.5 83,69.5 84,71.5 84,87 91,94.5 91,92.5 95,95 93,95.5 91,90.5 94,83.5 44.5,73 25.3,70.3 23.3,70.3 21.3,70.3 16.5,97.5 14,97.5 11.5,97.5 9,97.5 4.5,93.5 4.5,91 6,89 7.5,87.5 19,97.5 21.5,97.5 24,97.5 26.5,97.5 29,97.5 31.5,97.5 34,97.5 36.5,97.5 39,97.5 41.5,97.5 6.5,97.5 9,86 7,85 4.5,85 3,83.5 10.5,85
  pour Bottom: 99,51 1,51 1,99 99,99
  pour Top: 99,51 1,51 1,99 99,99
  pour Route2: 99,51 1,51 1,99 99,99
ICSPCLK  (via drill 0.5)
  Top 0.3: v38.7,18.9 39.9,20.1 v39.9,21.4
  Bottom 0.3: U$1.5 12.66,4.86 13.9,6.1 24.7,6.1 37.5,18.9 v38.7,18.9 | v39.9,21.4 40.5,22 U1.17
ICSPCLK1  (via drill 0.5)
  Top 0.3: v38.7,68.9 39.9,70.1 v39.9,71.4
  Bottom 0.3: U$2.5 12.66,54.86 13.9,56.1 24.7,56.1 37.5,68.9 v38.7,68.9 | v39.9,71.4 40.5,72 U5.17
ICSPDAT
  Bottom 0.3: U$1.4 10.12,4.12 12.7,6.7 24.45,6.7 37.77,20.03 39.93,20.03 41.3,21.4 U1.16
ICSPDAT1
  Bottom 0.3: U$2.4 10.12,54.12 12.7,56.7 24.45,56.7 37.77,70.03 39.93,70.03 41.3,71.4 U5.16
LCD-BACKLIGHT-A
  Bottom 0.5: R32.2 X1.15
LCD-BACKLIGHT-A1
  Bottom 0.5: R62.2 X2.15
LCD-BACKLIGHT-ENABLE
  Bottom 0.3: U1.11 48,27 48.6,26.4 52.7,26.4 53.8,27.5 53.8,34.6 56.1,36.9 57.3,36.9 58.95,38.55 R29.2 R28.1
LCD-BACKLIGHT-ENABLE1
  Bottom 0.3: U5.11 48,77 48.6,76.4 52.7,76.4 53.8,77.5 53.8,84.6 56.1,86.9 57.3,86.9 58.95,88.55 R51.2 R52.1
LCD-D0
  Bottom 0.3: U1.43 43.7,38.2 43.3,38.6 37.25,38.6 36.65,39.2 34.6,39.2 33.24,40.56 X1.7
LCD-D1
  Bottom 0.3: U1.44 44.5,38.5 43.8,39.2 37.5,39.2 35.78,40.92 X1.8
LCD-D2  (via drill 0.5)
  Top 0.3: v39.8,31.7 38.32,33.18 X1.9
  Bottom 0.3: U1.1 45.6,35 45.3,35.3 43.4,35.3 v39.8,31.7
LCD-D3  (via drill 0.5)
  Top 0.3: v42,31.6 40.86,32.74 X1.10
  Bottom 0.3: U1.2 45.55,34.2 45.05,34.7 43.73,34.7 42,32.97 v42,31.6
LCD-D4  (via drill 0.5)
  Top 0.3: v44.1,33.8 43.4,34.5 X1.11
  Bottom 0.3: U1.3 45.5,33.4 45.1,33.8 v44.1,33.8
LCD-D5  (via drill 0.5)
  Top 0.3: v42.9,32.6 44.7,32.6 45.94,33.84 X1.12
  Bottom 0.3: U1.4 45.4,32.6 45.1,32.9 43.8,32.9 43.5,32.6 v42.9,32.6
LCD-D6  (via drill 0.5)
  Top 0.3: v43.4,31.4 43.9,31.9 46.25,31.9 48.48,34.13 X1.13
  Bottom 0.3: U1.5 45.2,31.8 44.9,32.1 44.1,32.1 v43.4,31.4
LCD-D7  (via drill 0.5)
  Top 0.3: v44.6,29.4 51.02,35.82 X1.14
  Bottom 0.3: U1.8 v44.6,29.4
LCD-D8
  Bottom 0.3: U5.44 44.5,88.5 43.8,89.2 37.5,89.2 35.78,90.92 X2.8
LCD-D9  (via drill 0.5)
  Top 0.3: v39.8,81.7 38.32,83.18 X2.9
  Bottom 0.3: U5.1 45.6,85 45.3,85.3 43.4,85.3 v39.8,81.7
LCD-D10  (via drill 0.5)
  Top 0.3: v42,81.6 40.86,82.74 X2.10
  Bottom 0.3: U5.2 45.55,84.2 45.05,84.7 43.73,84.7 42,82.97 v42,81.6
LCD-D11
  Bottom 0.3: U5.43 43.7,88.2 43.3,88.6 37.25,88.6 36.65,89.2 34.6,89.2 33.24,90.56 X2.7
LCD-D12  (via drill 0.5)
  Top 0.3: v44.1,83.8 43.4,84.5 X2.11
  Bottom 0.3: U5.3 45.5,83.4 45.1,83.8 v44.1,83.8
LCD-D13  (via drill 0.5)
  Top 0.3: v42.9,82.6 44.7,82.6 45.94,83.84 X2.12
  Bottom 0.3: U5.4 45.4,82.6 45.1,82.9 43.8,82.9 43.5,82.6 v42.9,82.6
LCD-D14  (via drill 0.5)
  Top 0.3: v43.4,81.4 43.9,81.9 46.25,81.9 48.48,84.13 X2.13
  Bottom 0.3: U5.5 45.2,81.8 44.9,82.1 44.1,82.1 v43.4,81.4
LCD-D15  (via drill 0.5)
  Top 0.3: v44.6,79.4 51.02,85.82 X2.14
  Bottom 0.3: U5.8 v44.6,79.4
LCD-RE  (via drill 0.5)
  Top 0.3: v39.8,29.9 30.7,39 X1.6
  Bottom 0.3: U1.42 42.9,35.65 39.85,32.6 39.43,32.6 38.9,32.07 38.9,31.33 39.8,30.43 v39.8,29.9
LCD-RE1  (via drill 0.5)
  Top 0.3: v39.8,79.9 30.7,89 X2.6
  Bottom 0.3: U5.42 42.9,85.65 39.85,82.6 39.43,82.6 38.9,82.07 38.9,81.33 39.8,80.43 v39.8,79.9
LCD-RS  (via drill 0.5)
  Top 0.3: v37,29.9 37,31 29.3,38.7 27.6,38.7 25.62,40.68 X1.4
  Bottom 0.3: U1.40 41.3,35.75 39.35,33.8 38.93,33.8 37.7,32.57 37.7,30.6 v37,29.9
LCD-RS1  (via drill 0.5)
  Top 0.3: v37,79.9 37,81 29.3,88.7 27.6,88.7 25.62,90.68 X2.4
  Bottom 0.3: U5.40 41.3,85.75 39.35,83.8 38.93,83.8 37.7,82.57 37.7,80.6 v37,79.9
LCD-RW  (via drill 0.5)
  Top 0.3: v38.3,29.9 38.3,30.55 28.16,40.69 X1.5
  Bottom 0.3: U1.41 42.1,35.7 39.6,33.2 39.18,33.2 38.3,32.32 v38.3,29.9
LCD-RW1  (via drill 0.5)
  Top 0.3: v38.3,79.9 38.3,80.55 28.16,90.69 X2.5
  Bottom 0.3: U5.41 42.1,85.7 39.6,83.2 39.18,83.2 38.3,82.32 v38.3,79.9
LCD-V0  (via drill 0.5)
  Top 0.5: v11.5,16.3 3.1,24.7 3.1,31.6 5.3,33.8 17.8,33.8 23.08,39.08 X1.3
  Bottom 0.5: R24.1 R25.1 R26.1 13.45,15.85 C13.+ 12.1,15.7 v11.5,16.3
LCD-V1  (via drill 0.5)
  Top 0.5: v11.5,66.3 3.1,74.7 3.1,81.6 5.3,83.8 17.8,83.8 23.08,89.08 X2.3
  Bottom 0.5: R37.1 R44.1 R50.1 13.45,65.85 C24.+ 12.1,65.7 v11.5,66.3
LCD_ENABLE
  Bottom 0.3: R27.2 46.5,25 44.5,27 U1.23
LCD_ENABLE1
  Bottom 0.3: R53.2 46.5,75 44.5,77 U5.23
LED1  (via drill 0.5)
  Top 0.5: v82.7,20.9 82.7,24.09 90.3,31.69 v90.3,31.7
  Bottom 0.3: U1.14 42.9,21.35 44.15,20.1 79.8,20.1 80.6,20.9 v82.7,20.9
  Bottom 0.5: R4.1 v90.3,31.7
LED1.K
  Bottom 0.5: LED1.C 90.15,34.9 R4.2
LED1.K1
  Bottom 0.5: LED3.C 90.15,84.9 R59.2
LED2  (via drill 0.5)
  Top 0.5: v82.7,70.9 82.7,74.09 90.3,81.69 v90.3,81.7
  Bottom 0.3: U5.14 42.9,71.35 44.15,70.1 79.8,70.1 80.6,70.9 v82.7,70.9
  Bottom 0.5: R59.1 v90.3,81.7
LED2.K
  Bottom 0.5: LED2.C 91.75,24.8 R12.2
LED2.K1
  Bottom 0.5: LED4.C 91.75,74.8 R48.2
MCLR
  Bottom 0.3: C8.+ 3.1,13.9 3.8,14.6 7.7,14.6 9.1,13.2 9.1,9.4 11.2,7.3 24.2,7.3 39.7,22.8 U1.18
  Bottom 0.5: R8.1 R9.1 3.05,12.35 C8.+
MCLR1
  Bottom 0.3: C22.+ 3.1,63.9 3.8,64.6 7.7,64.6 9.1,63.2 9.1,59.4 11.2,57.3 24.2,57.3 39.7,72.8 U5.18
  Bottom 0.5: R56.1 R23.1 3.05,62.35 C22.+
P1-1
  Bottom 0.5: U$1.1 2.5,4 3.3,4.8 4.3,4.8 4.95,5.45 R8.2
P1-2
  Bottom 0.5: U$2.1 2.5,54 3.3,54.8 4.3,54.8 4.95,55.45 R56.2
PROG
  Bottom 0.5: R18.1 93.8,27.16 U2.5
PROG1
  Bottom 0.5: R49.1 93.8,77.16 U7.5
Q1.D
  Bottom 0.5: R19.2 57,32.5 57.3,32.2 Q1.3
Q1.D1
  Bottom 0.5: R54.2 57,82.5 57.3,82.2 Q7.3
Q1.G
  Bottom 0.5: R17.1 55.75,28.25 55.1,28.9 Q1.1
Q1.G1
  Bottom 0.5: R46.1 55.75,78.25 55.1,78.9 Q7.1
Q2.G
  Bottom 0.5: Q2.1 60.5,36.1 59.85,35.45 R20.2 R19.1
Q2.G1
  Bottom 0.5: Q5.1 60.5,86.1 59.85,85.45 R38.2 R54.1
Q2.S
  Bottom 0.5: R21.2 67.45,36.1 C11.+ Q2.2
Q2.S1
  Bottom 0.5: R39.2 67.45,86.1 C41.+ Q5.2
Q3.D
  Bottom 0.5: Q3.3 66,42.6 R30.2
Q3.D1
  Bottom 0.5: Q8.3 66,92.6 R57.2
Q3.G
  Bottom 0.5: Q3.1 60.9,40.65 R29.1
Q3.G1
  Bottom 0.5: Q8.1 60.9,90.65 R51.1
Q4.G
  Bottom 0.5: R30.1 64.95,45.25 64.5,44.8 63.3,44.8 C19.+ 61.65,44.9 R31.2 59.3,45.55 Q4.1
Q4.G1
  Bottom 0.5: R57.1 64.95,95.25 64.5,94.8 63.3,94.8 C23.+ 61.65,94.9 R58.2 59.3,95.55 Q6.1
Q4.S
  Bottom 0.5: Q4.2 R32.1
Q4.S1
  Bottom 0.5: Q6.2 R62.1
RA0  (via drill 0.5)
  Top 0.5: v34.4,19.5 34.4,20.67 39.23,25.5 54,25.5 54.6,24.9 56.5,24.9 57.4,25.8 57.4,29.4 v67.5,39.5
  Bottom 0.3: U1.19 38.9,23.3 35.1,19.5 v34.4,19.5
  Bottom 0.5: v67.5,39.5 R21.1 R22.2
RA1  (via drill 0.5)
  Top 0.5: v32.7,20.1 38.9,26.3 v55,26.3
  Bottom 0.3: U1.20 38.1,23.7 35.1,20.7 33.3,20.7 v32.7,20.1
  Bottom 0.5: R16.1 R17.2 56.65,26.3 v55,26.3
RA2
  Bottom 0.3: R25.2 16.4,19.9 17.8,21.3 34.85,21.3 37.3,23.75 U1.21
RA3
  Bottom 0.3: R24.2 34.6,21.9 36.5,23.8 U1.22
RA4
  Bottom 0.3: R44.2 16.4,69.9 17.8,71.3 34.85,71.3 37.3,73.75 U5.21
RA5  (via drill 0.5)
  Top 0.5: v34.4,69.5 34.4,70.67 39.23,75.5 54,75.5 54.6,74.9 56.5,74.9 57.4,75.8 57.4,79.4 v67.5,89.5
  Bottom 0.3: U5.19 38.9,73.3 35.1,69.5 v34.4,69.5
  Bottom 0.5: v67.5,89.5 R39.1 R45.2
RA6
  Bottom 0.3: R37.2 34.6,71.9 36.5,73.8 U5.22
RA7  (via drill 0.5)
  Top 0.5: v32.7,70.1 38.9,76.3 v55,76.3
  Bottom 0.3: U5.20 38.1,73.7 35.1,70.7 33.3,70.7 v32.7,70.1
  Bottom 0.5: R47.1 R46.2 56.65,76.3 v55,76.3
SW1.1
  Bottom 0.5: SW1.1 5.02,27.97 R13.2
SW1.2
  Bottom 0.5: SW1.2 7.06,28.01 R14.2
SW1.3
  Bottom 0.5: SW1.3 9.1,31.7 8.6,32.2 4.3,32.2 3.55,31.45 R10.2
SW1.4
  Bottom 0.5: SW1.4 11.14,28.01 R15.2
SW1.5
  Bottom 0.5: SW2.1 5.02,77.97 R33.2
SW1.6
  Bottom 0.5: SW2.2 7.06,78.01 R34.2
SW1.7
  Bottom 0.5: SW2.4 11.14,78.01 R35.2
SW1.8
  Bottom 0.5: SW2.3 9.1,81.7 8.6,82.2 4.3,82.2 3.55,81.45 R43.2
SW1.A
  Bottom 0.5: R1.1 R6.1 21.25,33.35 20.8,32.9 C2.+ 15.7,32.9 9.1,39.5 SW1.B
SW1.A1
  Bottom 0.5: R41.1 R60.1 21.25,83.35 20.8,82.9 C26.+ 15.7,82.9 9.1,89.5 SW2.B
SW1.B
  Bottom 0.5: R2.1 R7.1 21.45,26.35 21,25.9 C4.+ 17.4,25.9 16.2,27.1 16.2,31.07 6.56,40.71 SW1.A
SW1.B1
  Bottom 0.5: R40.1 R61.1 21.45,76.35 21,75.9 C27.+ 17.4,75.9 16.2,77.1 16.2,81.07 6.56,90.71 SW2.A
U4.1
  Bottom 0.5: R12.1 91.2,27.75 U2.1
U4.2
  Bottom 0.5: R48.1 91.2,77.75 U7.1
U4.3
  Bottom 0.3: R27.1 65.9,25 67.5,26.6 67.5,28.2 68.9,29.6 78,29.6 78.3,29.9 U4.3
U4.4
  Bottom 0.3: R53.1 65.9,75 67.5,76.6 67.5,78.2 68.9,79.6 78,79.6 78.3,79.9 U6.3
VBAT  (via drill 0.5)
  Route15 0.5: C12.+ 66.1,31.85 86.25,31.85 87,31.1 v87,30.5
  Bottom 0.5: U2.3 89.83,30.45 88,28.61 F1.2 | F1.2 86.78,28.4 C10.+ C15.+ 80.95,28.45 U3.1 77.35,28.45 76.9,28 76.9,26.9 77.25,26.55 U3.3 | U4.1 79.05,32.45 80,33.4 C14.+ 82.1,33.4 82.4,33.1 82.4,32.7 83.4,31.7 85.81,31.7 86.5,31.01 86.5,31 v87,30.5 F1.2 | C12.+ 65,32 63.1,33.9 Q2.3 60.8,33.9 60.45,33.55 R20.1
VBAT1  (via drill 0.5)
  Route15 0.5: C40.+ 66.1,81.85 86.25,81.85 87,81.1 v87,80.5
  Bottom 0.5: U7.3 89.83,80.45 88,78.61 F2.2 | F2.2 86.78,78.4 C39.+ C30.+ 80.95,78.45 U8.1 77.35,78.45 76.9,78 76.9,76.9 77.25,76.55 U8.3 | U6.1 79.05,82.45 80,83.4 C34.+ 82.1,83.4 82.4,83.1 82.4,82.7 83.4,81.7 85.81,81.7 86.5,81.01 86.5,81 v87,80.5 F2.2 | C40.+ 65,82 63.1,83.9 Q5.3 60.8,83.9 60.45,83.55 R38.1
VUSB  (via drill 0.5)
  Route15 0.5: v89.8,27.6 89.8,29 92.4,31.6 v93.8,31.6
  Bottom 0.3: U2.4 94.65,30.45 94.8,30.3 J1.1
  Bottom 0.5: LED2.A 90.1,27.3 v89.8,27.6 | U2.4 v93.8,31.59 v93.8,31.6
VUSB1  (via drill 0.5)
  Route15 0.5: v89.8,77.6 89.8,79 92.4,81.6 v93.8,81.6
  Bottom 0.3: U7.4 94.65,80.45 94.8,80.3 J2.1
  Bottom 0.5: LED4.A 90.1,77.3 v89.8,77.6 | U7.4 v93.8,81.59 v93.8,81.6

## Text on the board
_bPlace: BT1 | BT1
_tNames: B1 | B1
_bNames: C19 | Q4 | R32 | R31 | R28 | Q3 | R30 | C11 | C16 | R29 | R21 | R22 | C5 | C18 | C2 | U1 | R20 | R6 | R1 | R19 | R5 | R3 | LED1 | R4 | C21 | C14 | Q2 | C12 | C1 | C3 | U4 | Q1 | U2 | C4 | C10 | F1 | SW1 | R7 | R2 | C6 | C7 | C20 | C17 | LED2 | R27 | U3 | R13 | R14 | R15 | R17 | R16 | C15 | J1 | R12 | R18 | R10 | R24 | C9 | R25 | R11 | R26 | C13 | C8 | R9 | R8 | C19 | Q4 | R32 | R31 | R28 | Q3 | R30 | C11 | C16 | R29 | R21 | R22 | C5 | C18 | C2 | U1 | R20 | R6 | R1 | R19 | R5 | R3 | LED1 | R4 | C21 | C14 | Q2 | C12 | C1 | C3 | U4 | Q1 | U2 | C4 | C10 | F1 | SW1 | R7 | R2 | C6 | C7 | C20 | C17 | LED2 | R27 | U3 | R13 | R14 | R15 | R17 | R16 | C15 | J1 | R12 | R18 | R10 | R24 | C9 | R25 | R11 | R26 | C13 | C8 | R9 | R8